# Altium PCB KNX_MCU_16CH_V1.2.PcbDoc (part 1 of 2)
Units mm, origin at the board's own origin, x right, y up, seen from the top; angles counter-clockwise.
Board outline 146.28 x 64.4 mm, 2 copper layers (F.Cu, B.Cu), stack 1.581 mm thick; 120 components, 124 nets, 397 pads, 284 vias.
Unrouted connection lines stored in the file: 62.
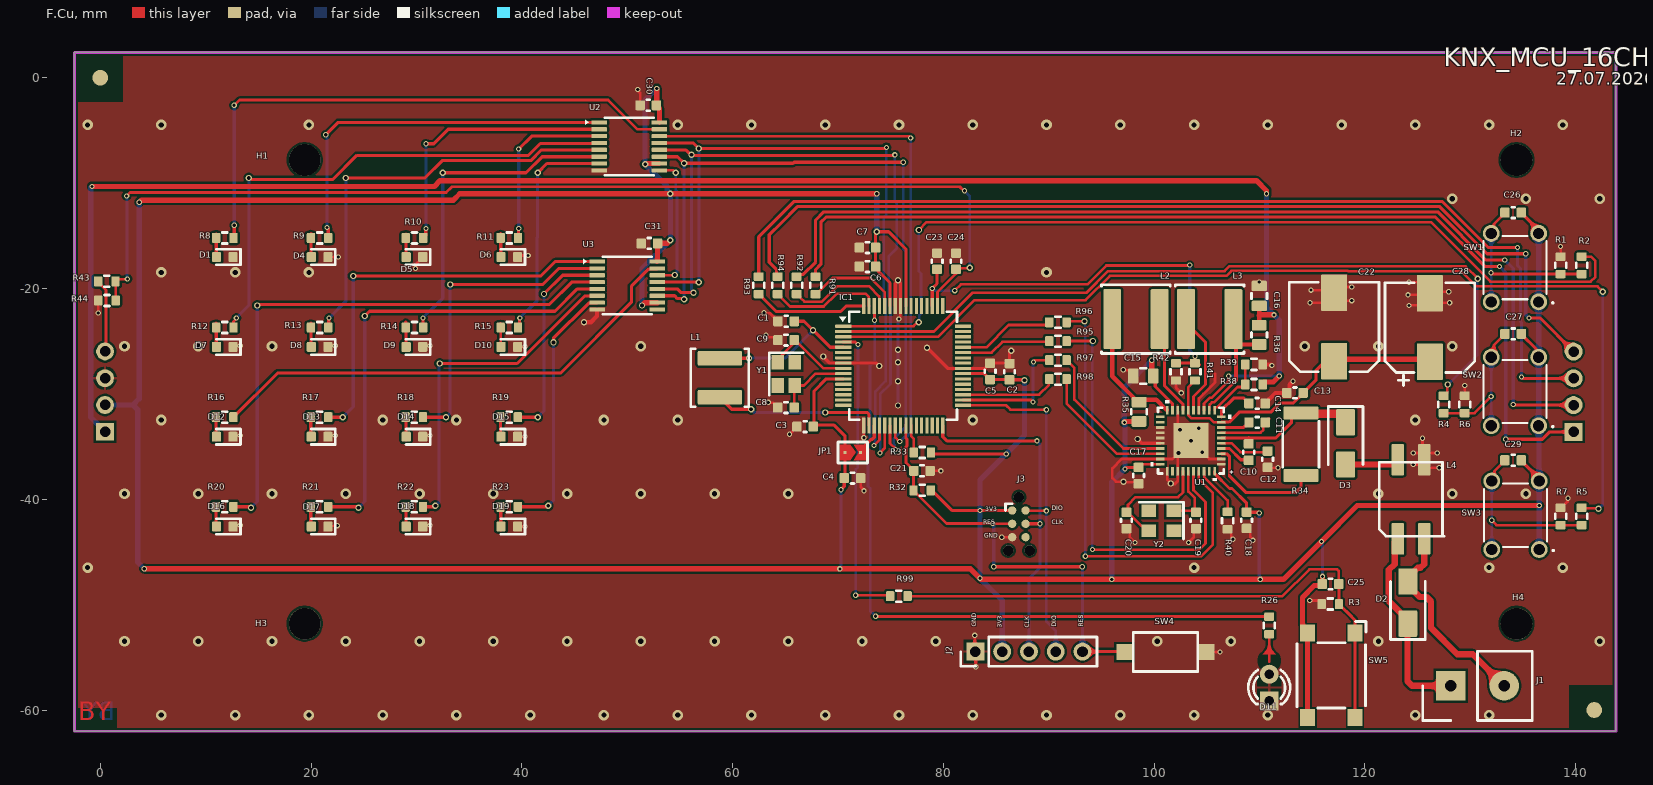
[diagram p0: F.Cu view]
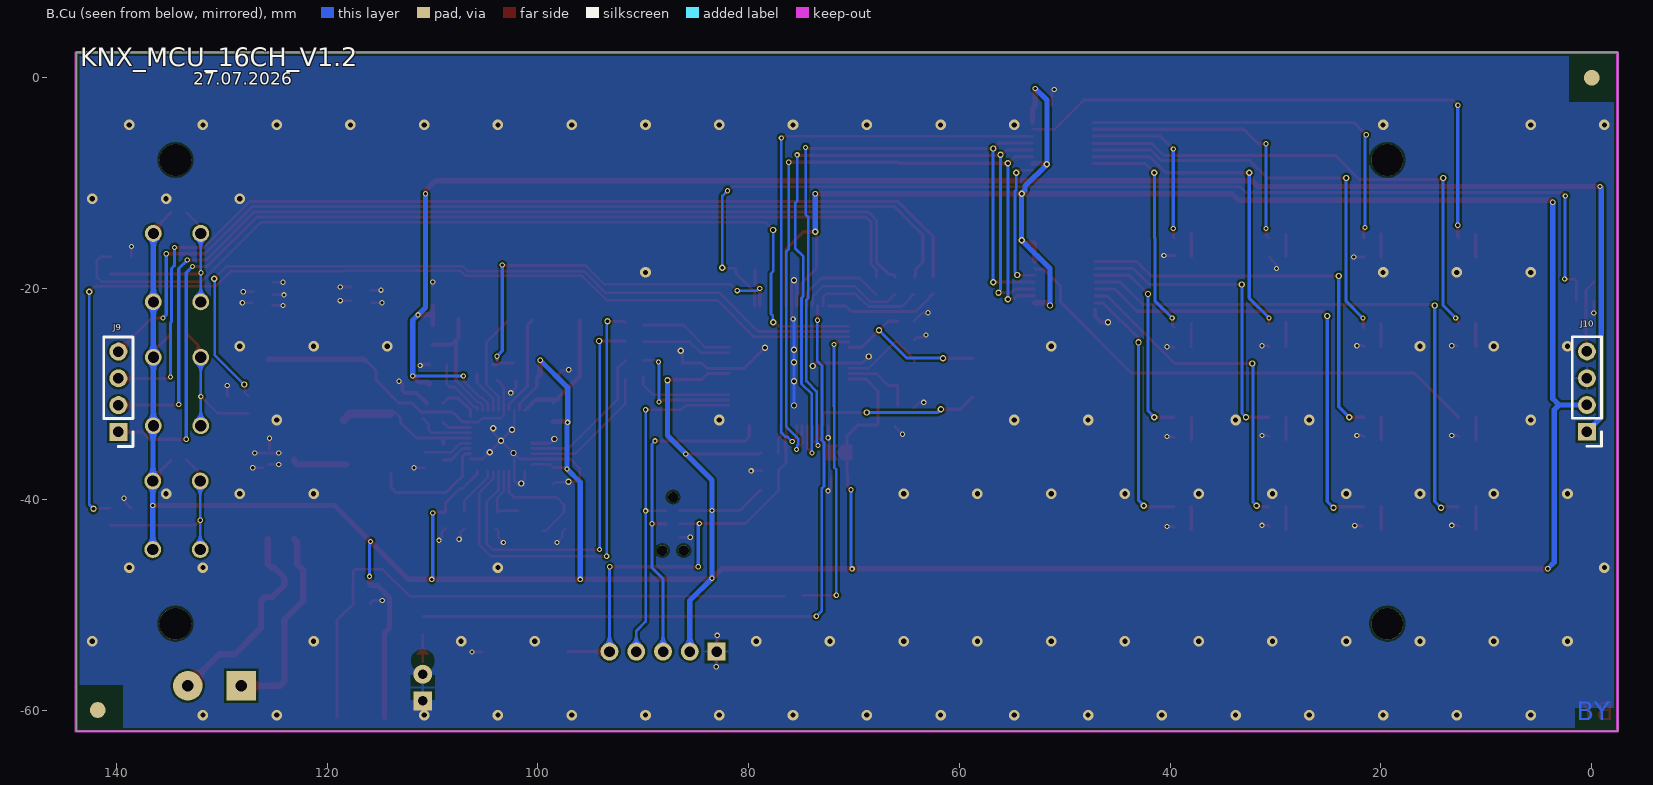
[diagram p1: B.Cu view, seen from below]

## Layer stack, top to bottom
F.Mask: solder mask 0.0102, Solder Resist, Dk 3.5
F.Cu: signal copper 0.0356
Dielectric 1: dielectric 1.51, FR-4, Dk 4.8
B.Cu: signal copper 0.0356
B.Mask: solder mask 0.0102, Solder Resist, Dk 3.5

## Board outline
-2.45,-62 -2.45,2.4 143.83,2.4 143.83,-62

## Design rules (kind name [scope] priority, off if disabled: settings)
Clearance "Clearence 0,5_Polygon" [InNamedPolygon('F.Cu--2') OR InNamedPolygon('B.Cu--2') OR InNamedPolygon('F.Cu--3') OR InNamedPolygon('B.Cu--3')] p1: gap=0.5 ignorepadtopadclearanceinfootprint=FALSE
Clearance "Clearence 0,4_Polygon" [InNamedPolygon('F.Cu--1') OR InNamedPolygon('B.Cu--1')] p2: gap=0.4 ignorepadtopadclearanceinfootprint=FALSE
Clearance "Clearence 0,3_Polygon" [InNamedPolygon('F.Cu-') OR InNamedPolygon('B.Cu-')] p3: gap=0.3 ignorepadtopadclearanceinfootprint=FALSE
Clearance [All] p4: gap=0.2 ignorepadtopadclearanceinfootprint=TRUE
ComponentClearance [All] p1: gap=0 collisioncheckmode=3 verticalgap=0.01 showdistances=FALSE
MinimumSolderMaskSliver [All] p1: minsoldermaskwidth=0
PolygonConnect [All] p1: thpad.connectstyle=Relief thpad.reliefconductorwidth=0.254 thpad.reliefentries=4 thpad.polygonreliefangle="90 Angle" thpad.airgapwidth=0.254 smdpad.connectstyle=Direct smdpad.reliefconductorwidth=0.254 smdpad.reliefentries=4 smdpad.polygonreliefangle="90 Angle" smdpad.airgapwidth=0.254 via.connectstyle=Direct via.reliefconductorwidth=0.254 via.reliefentries=4 via.polygonreliefangle="90 Angle" via.airgapwidth=0.254
PolygonConnect Polygon_B.Cu--3_ConnectDirect [IsNamedPolygon('B.Cu--3') vs IsVia] p2: connectstyle=Direct reliefconductorwidth=0.254 reliefentries=4 polygonreliefangle="90 Angle" airgapwidth=0.254
PolygonConnect Polygon_B.Cu--3_ConnectRelief45 [IsNamedPolygon('B.Cu--3') vs (IsThruPin or IsSMTPin) and (PadShape_AllLayers = 'Round')] p3: connectstyle=Relief reliefconductorwidth=0.4 reliefentries=4 polygonreliefangle="45 Angle" airgapwidth=0.4
PolygonConnect Polygon_B.Cu--3_ConnectRelief90 [IsNamedPolygon('B.Cu--3') vs (IsThruPin or IsSMTPin) and (PadShape_AllLayers <> 'Round')] p4: connectstyle=Relief reliefconductorwidth=0.4 reliefentries=4 polygonreliefangle="90 Angle" airgapwidth=0.4
PolygonConnect Polygon_F.Cu--3_ConnectDirect [IsNamedPolygon('F.Cu--3') vs IsVia] p5: connectstyle=Direct reliefconductorwidth=0.254 reliefentries=4 polygonreliefangle="90 Angle" airgapwidth=0.254
PolygonConnect Polygon_F.Cu--3_ConnectRelief45 [IsNamedPolygon('F.Cu--3') vs (IsThruPin or IsSMTPin) and (PadShape_AllLayers = 'Round')] p6: connectstyle=Relief reliefconductorwidth=0.4 reliefentries=4 polygonreliefangle="45 Angle" airgapwidth=0.4
PolygonConnect Polygon_F.Cu--3_ConnectRelief90 [IsNamedPolygon('F.Cu--3') vs (IsThruPin or IsSMTPin) and (PadShape_AllLayers <> 'Round')] p7: connectstyle=Relief reliefconductorwidth=0.4 reliefentries=4 polygonreliefangle="90 Angle" airgapwidth=0.4
PolygonConnect Polygon_B.Cu--2_ConnectDirect [IsNamedPolygon('B.Cu--2') vs IsVia] p8: connectstyle=Direct reliefconductorwidth=0.254 reliefentries=4 polygonreliefangle="90 Angle" airgapwidth=0.254
PolygonConnect Polygon_B.Cu--2_ConnectRelief45 [IsNamedPolygon('B.Cu--2') vs (IsThruPin or IsSMTPin) and (PadShape_AllLayers = 'Round')] p9: connectstyle=Relief reliefconductorwidth=0.4 reliefentries=4 polygonreliefangle="45 Angle" airgapwidth=0.4
PolygonConnect Polygon_B.Cu--2_ConnectRelief90 [IsNamedPolygon('B.Cu--2') vs (IsThruPin or IsSMTPin) and (PadShape_AllLayers <> 'Round')] p10: connectstyle=Relief reliefconductorwidth=0.4 reliefentries=4 polygonreliefangle="90 Angle" airgapwidth=0.4
PolygonConnect Polygon_F.Cu--2_ConnectDirect [IsNamedPolygon('F.Cu--2') vs IsVia] p11: connectstyle=Direct reliefconductorwidth=0.254 reliefentries=4 polygonreliefangle="90 Angle" airgapwidth=0.254
PolygonConnect Polygon_F.Cu--2_ConnectRelief45 [IsNamedPolygon('F.Cu--2') vs (IsThruPin or IsSMTPin) and (PadShape_AllLayers = 'Round')] p12: connectstyle=Relief reliefconductorwidth=0.4 reliefentries=4 polygonreliefangle="45 Angle" airgapwidth=0.4
PolygonConnect Polygon_F.Cu--2_ConnectRelief90 [IsNamedPolygon('F.Cu--2') vs (IsThruPin or IsSMTPin) and (PadShape_AllLayers <> 'Round')] p13: connectstyle=Relief reliefconductorwidth=0.4 reliefentries=4 polygonreliefangle="90 Angle" airgapwidth=0.4
PolygonConnect Polygon_B.Cu--1_ConnectDirect [IsNamedPolygon('B.Cu--1') vs IsVia] p14: connectstyle=Direct reliefconductorwidth=0.254 reliefentries=4 polygonreliefangle="90 Angle" airgapwidth=0.254
PolygonConnect Polygon_B.Cu--1_ConnectRelief45 [IsNamedPolygon('B.Cu--1') vs (IsThruPin or IsSMTPin) and (PadShape_AllLayers = 'Round')] p15: connectstyle=Relief reliefconductorwidth=0.4 reliefentries=4 polygonreliefangle="45 Angle" airgapwidth=0.4
PolygonConnect Polygon_B.Cu--1_ConnectRelief90 [IsNamedPolygon('B.Cu--1') vs (IsThruPin or IsSMTPin) and (PadShape_AllLayers <> 'Round')] p16: connectstyle=Relief reliefconductorwidth=0.4 reliefentries=4 polygonreliefangle="90 Angle" airgapwidth=0.4
PolygonConnect Polygon_F.Cu--1_ConnectDirect [IsNamedPolygon('F.Cu--1') vs IsVia] p17: connectstyle=Direct reliefconductorwidth=0.254 reliefentries=4 polygonreliefangle="90 Angle" airgapwidth=0.254
PolygonConnect Polygon_F.Cu--1_ConnectRelief45 [IsNamedPolygon('F.Cu--1') vs (IsThruPin or IsSMTPin) and (PadShape_AllLayers = 'Round')] p18: connectstyle=Relief reliefconductorwidth=0.4 reliefentries=4 polygonreliefangle="45 Angle" airgapwidth=0.4
PolygonConnect Polygon_F.Cu--1_ConnectRelief90 [IsNamedPolygon('F.Cu--1') vs (IsThruPin or IsSMTPin) and (PadShape_AllLayers <> 'Round')] p19: connectstyle=Relief reliefconductorwidth=0.4 reliefentries=4 polygonreliefangle="90 Angle" airgapwidth=0.4
PolygonConnect Polygon_B.Cu-_ConnectDirect [IsNamedPolygon('B.Cu-') vs IsVia] p20: connectstyle=Direct reliefconductorwidth=0.254 reliefentries=4 polygonreliefangle="90 Angle" airgapwidth=0.254
PolygonConnect Polygon_B.Cu-_ConnectRelief45 [IsNamedPolygon('B.Cu-') vs (IsThruPin or IsSMTPin) and (PadShape_AllLayers = 'Round')] p21: connectstyle=Relief reliefconductorwidth=0.3 reliefentries=4 polygonreliefangle="45 Angle" airgapwidth=0.3
PolygonConnect Polygon_B.Cu-_ConnectRelief90 [IsNamedPolygon('B.Cu-') vs (IsThruPin or IsSMTPin) and (PadShape_AllLayers <> 'Round')] p22: connectstyle=Relief reliefconductorwidth=0.3 reliefentries=4 polygonreliefangle="90 Angle" airgapwidth=0.3
PolygonConnect Polygon_F.Cu-_ConnectDirect [IsNamedPolygon('F.Cu-') vs IsVia] p23: connectstyle=Direct reliefconductorwidth=0.254 reliefentries=4 polygonreliefangle="90 Angle" airgapwidth=0.254
PolygonConnect Polygon_F.Cu-_ConnectRelief45 [IsNamedPolygon('F.Cu-') vs (IsThruPin or IsSMTPin) and (PadShape_AllLayers = 'Round')] p24: connectstyle=Relief reliefconductorwidth=0.3 reliefentries=4 polygonreliefangle="45 Angle" airgapwidth=0.3
PolygonConnect Polygon_F.Cu-_ConnectRelief90 [IsNamedPolygon('F.Cu-') vs (IsThruPin or IsSMTPin) and (PadShape_AllLayers <> 'Round')] p25: connectstyle=Relief reliefconductorwidth=0.3 reliefentries=4 polygonreliefangle="90 Angle" airgapwidth=0.3
RoutingVias [All] p1: holewidth=0.711 width=1.27 viastyle="Through Hole" minholewidth=0.711 minwidth=1.27 maxholewidth=0.711 maxwidth=1.27
SilkToSilkClearance [All] p1: silktosilkclearance=0
SilkToSolderMaskClearance [IsPad] p1: minsilkscreentomaskgap=0 clearancetoexposedcopper=TRUE
SolderMaskExpansion [All] p1: expansion=0 istentingtop=FALSE
SupplyNets "Schematic Supply Nets_3" [InNet('+3V3')] p1: voltage=0.000
SupplyNets "Schematic Supply Nets_2" [InNet('GND')] p2: voltage=0.000
SupplyNets "Schematic Supply Nets" [InNet('+12V')] p3: voltage=0.000
Width [All] p1: maxlimit=10 minlimit=0.2 preferedwidth=0.254 minimp=50.000000 maximp=50.000000 favimp=50.000000
26 further rules are at their usual default settings.

## Classes and differential pairs
component class UI_BUTTON_LED: C26 C27 C29 C30 C31 D1 D4 D5 D6 D7 D8 D9 D10 D12 D13 D14 D15 D16 D17 D18 D19 R1 R2 R4 R5 R6 R7 R8 R9 R10 R11 R12 R13 R14 R15 R16 R17 R18 R19 R20 R21 R22 R23 SW1 SW2 SW3 U2 U3
component class "Transceiver for KNx": C10 C11 C12 C13 C14 C15 C16 C17 C18 C19 C20 C22 C28 D2 D3 L2 L3 L4 R34 R35 R36 R38 R39 R40 U1 Y2
component class MCU: C1 C2 C3 C4 C5 C6 C7 C8 C9 C21 IC1 JP1 L1 R32 R33 SW4 Y1
component class KNX-MCU-CONTROL_V0.2: C23 C24 C25 D11 H1 H2 H3 H4 J1 J2 J3 R3 R26 R41 R42 R43 R44 R95 R96 R97 R98 R99 SW5
component class Connectors: J9 J10 R91 R92 R93 R94

## Components (designator, comment, footprint, x,y, rotation, side; value= is the part's Value field where it differs from the comment)
C1 "4.7uF" C_0603_1608METRIC 65.08,-23.1 r0 top
C2 "1uF" C_0603_1608METRIC 86.288,-27.887 r270 top
C3 "100nF" C_0603_1608METRIC 66.88,-33.1 r0 top
C4 "100nF" C_0603_1608METRIC 71.38,-38 r180 top
C5 "100nF" C_0603_1608METRIC 84.448,-27.857 r270 top
C6 "100nF" C_0603_1608METRIC 72.8,-17.913 r0 top
C7 "2.2uF" C_0603_1608METRIC 72.8,-16.113 r0 top
C8 "15pF" C_0603_1608METRIC 65.08,-31.3 r180 top
C9 "15pF" C_0603_1608METRIC 65.08,-24.9 r180 top
C10 "47nF" C_0603_1608METRIC 108.98,-35.525 r90 top
C11 "220nF" C_0603_1608METRIC 109.78,-32.7 r0 top
C12 "100nF" C_0603_1608METRIC 110.78,-36.2 r90 top
C13 "100nF" C_0603_1608METRIC 113.38,-29.9 r180 top
C14 "1uF" C_0603_1608METRIC 109.78,-30.9 r180 top
C15 "10uF" C_0805_2012Metric 98.98,-28.3 r0 top
C16 "10uF" C_0805_2012Metric 109.98,-20.7 r270 top
C17 "100nF" C_0603_1608METRIC 98.527,-37.752 r90 top
C18 "100nF" C_0603_1608METRIC 108.78,-42 r90 top
C19 "10pF" C_0603_1608METRIC 103.98,-42 r270 top
C20 "10pF" C_0603_1608METRIC 97.38,-42 r270 top
C21 "100nF" C_0603_1608METRIC 77.98,-37.3 r180 top
C22 "100uF" CP_Elec_8x10#1 117.08,-23.65 r90 top
C23 "100nF" C_0603_1608METRIC 79.4,-17.413 r90 top
C24 "100nF" C_0603_1608METRIC 81.2,-17.413 r90 top
C25 "100nF" C_0603_1608METRIC 116.752,-48.043 r180 top
C26 "100nF" C_0603_1608METRIC 134.08,-12.8 r180 top
C27 "100nF" C_0603_1608METRIC 134.08,-24.3 r180 top
C28 "470uf/16V" CP_Elec_8x10#2 126.18,-23.7 r270 top
C29 "100nF" C_0603_1608METRIC 134.08,-36.3 r180 top
C30 "100nF" C_0603_1608METRIC 52,-2.613 r180 top
C31 "100nF" C_0603_1608METRIC 52.1,-15.713 r0 top
D1 "LED" LED_0603_1608METRIC 11.813,-17.013 r180 top locked
D2 "SMAJ40CA-HT" D_SMA 124.08,-49.8 r90 top
D3 "SS28" D_SMA 118.18,-34.7 r270 top
D4 "LED" LED_0603_1608METRIC 20.813,-17.013 r180 top locked
D5 "LED" LED_0603_1608METRIC 29.813,-17.013 r180 top locked
D6 "LED" LED_0603_1608METRIC 38.813,-17.013 r180 top locked
D7 "LED" LED_0603_1608METRIC 11.813,-25.538 r180 top locked
D8 "LED" LED_0603_1608METRIC 20.813,-25.538 r180 top locked
D9 "LED" LED_0603_1608METRIC 29.813,-25.538 r180 top locked
D10 "LED" LED_0603_1608METRIC 38.812,-25.538 r180 top locked
D11 "Led_Green" LED_D3.0MM 110.93,-57.87 r90 top locked
D12 "LED" LED_0603_1608METRIC 11.813,-34.062 r180 top locked
D13 "LED" LED_0603_1608METRIC 20.813,-34.062 r180 top locked
D14 "LED" LED_0603_1608METRIC 29.813,-34.062 r180 top locked
D15 "LED" LED_0603_1608METRIC 38.812,-34.062 r180 top locked
D16 "LED" LED_0603_1608METRIC 11.813,-42.587 r180 top locked
D17 "LED" LED_0603_1608METRIC 20.813,-42.587 r180 top locked
D18 "LED" LED_0603_1608METRIC 29.813,-42.587 r180 top locked
D19 "LED" LED_0603_1608METRIC 38.813,-42.587 r180 top locked
H1 "MountingHole" MOUNTINGHOLE_3MM 19.39,-7.8 r270 top
H2 "MountingHole" MOUNTINGHOLE_3MM 134.4,-7.8 r270 top
H3 "MountingHole" MOUNTINGHOLE_3MM 19.39,-51.8 r270 top
H4 "MountingHole" MOUNTINGHOLE_3MM 134.4,-51.8 r270 top
IC1 "R7FA2L1AB3CFM" LQFP-64_10X10MM_P0.5MM 76.193,-27.327 r0 top locked
J1 "L-KLS8-2170-13" SAMTEC_HPM-02-01-X-S_STRAIGHT_1X02_PITCH5.08MM 128.15,-57.7 r90 top locked
J2 "Conn_01x05" PinHeader_1x05_P2.54mm_Vertical 83.048,-54.457 r90 top
J3 "Conn_ARM_SWD_TagConnect_TC2030-NL" Tag-Connect_TC2030-IDC-NL_2x03_P1.27mm_Vertical 87.173,-42.327 r270 top
J9 "Conn_01x04" PINHEADER_1X04_P2.54MM_VERTICAL 139.816,-33.604 r0 bottom locked
J10 "Conn_01x04" PINHEADER_1X04_P2.54MM_VERTICAL 0.45,-33.59 r0 bottom locked
JP1 "SolderJumper_2_Open" SolderJumper-2_P1.3mm_Open_TrianglePad1.0x1.5mm 71.408,-35.557 r0 top
L1 "4.7uH" L_APV_ANR5012 58.788,-28.467 r270 top
L2 "220uH" L_APV_ANR6028 98.28,-22.9 r180 top
L3 "220uH" L_APV_ANR6028 105.28,-22.9 r0 top
L4 "50474C" L_CommonMode_50474C_7.5x5.9mm 124.38,-40 r90 top
R1 "10k" R_0603_1608METRIC 138.58,-17.8 r90 top
R2 "330R" R_0603_1608METRIC 140.58,-17.8 r270 top
R3 "10K" R_0603_1608METRIC 116.727,-49.943 r0 top
R4 "330R" R_0603_1608METRIC 127.48,-31 r270 top
R5 "330R" R_0603_1608METRIC 140.58,-41.625 r270 top
R6 "10k" R_0603_1608METRIC 129.48,-31 r90 top
R7 "10k" R_0603_1608METRIC 138.58,-41.625 r90 top
R8 "1k" R_0603_1608METRIC 11.813,-15.2 r180 top
R9 "1k" R_0603_1608METRIC 20.813,-15.2 r180 top
R10 "1k" R_0603_1608METRIC 29.813,-15.2 r180 top
R11 "1k" R_0603_1608METRIC 38.813,-15.2 r180 top
R12 "1k" R_0603_1608METRIC 11.813,-23.7 r180 top
R13 "1k" R_0603_1608METRIC 20.813,-23.7 r180 top
R14 "1k" R_0603_1608METRIC 29.813,-23.7 r180 top
R15 "1k" R_0603_1608METRIC 38.813,-23.7 r180 top
R16 "1k" R_0603_1608METRIC 11.8,-32.213 r180 top
R17 "1k" R_0603_1608METRIC 20.8,-32.213 r180 top
R18 "1k" R_0603_1608METRIC 29.8,-32.213 r180 top
R19 "1k" R_0603_1608METRIC 38.8,-32.213 r180 top
R20 "1k" R_0603_1608METRIC 11.8,-40.713 r180 top
R21 "1k" R_0603_1608METRIC 20.8,-40.713 r180 top
R22 "1k" R_0603_1608METRIC 29.8,-40.713 r180 top
R23 "1k" R_0603_1608METRIC 38.8,-40.713 r180 top
R26 "1K" R_0603_1608METRIC 110.93,-51.97 r270 top
R32 "10K" R_0603_1608METRIC 77.998,-39.157 r0 top
R33 "10K" R_0603_1608METRIC 78.008,-35.557 r0 top
R34 "27R" R_2512_6332Metric 113.937,-34.772 r270 top
R35 "1R" R_0805_2012Metric 98.58,-31.7 r270 top
R36 "1R" R_0805_2012Metric 109.98,-24.4 r90 top
R38 "91K" R_0603_1608METRIC 109.48,-29.1 r180 top
R39 "10K" R_0603_1608METRIC 109.48,-27.2 r0 top
R40 "20k" R_0603_1608METRIC 106.977,-42.022 r90 top
R41 "220k" R_0603_1608METRIC 103.88,-27.9 r90 top
R42 "27k" R_0603_1608METRIC 102.08,-27.9 r270 top
R43 "100k" R_0603_1608METRIC 0.616,-19.319 r0 top
R44 "27k" R_0603_1608METRIC 0.636,-21.129 r180 top
R91 "33R" R_0603_1608METRIC 67.88,-19.7 r90 top
R92 "33R" R_0603_1608METRIC 66.08,-19.7 r90 top
R93 "33R" R_0603_1608METRIC 62.48,-19.7 r90 top
R94 "33R" R_0603_1608METRIC 64.28,-19.7 r90 top
R95 "33R" R_0603_1608METRIC 90.88,-25 r180 top
R96 "33R" R_0603_1608METRIC 90.88,-23.2 r180 top
R97 "33R" R_0603_1608METRIC 90.88,-26.8 r180 top
R98 "33R" R_0603_1608METRIC 90.88,-28.6 r180 top
R99 "330R" R_0603_1608METRIC 75.78,-49.2 r180 top
SW1 "TL1105BF160Q" TL1105 134.248,-18.017 r90 top locked
SW2 "TL1105BF160Q" TL1105 134.248,-29.767 r90 top locked
SW3 "TL1105BF160Q" TL1105 134.298,-41.517 r90 top locked
SW4 "SW_Push" SW_SPST_CK_RS282G05A3 101.08,-54.5 r0 top
SW5 "SW_Push" SW_SPST_OMRON_B3FS-100XP 116.82,-56.7 r270 top locked
U1 "NCN5130MNTWG" QFN40_485AU-01_ONS 103.497,-34.432 r180 top locked
U2 "74HC595PW,118" TSSOP-16_4.4X5MM_P0.65MM 50.2,-6.513 r0 top
U3 "74HC595PW,118" TSSOP-16_4.4X5MM_P0.65MM 50,-19.713 r0 top
Y1 "20Mhz" Crystal_SMD_SeikoEpson_FA238-4Pin_3.2x2.5mm 65.088,-28.102 r270 top
Y2 "16Mhz" Crystal_SMD_SeikoEpson_FA238V-4Pin_3.2x2.5mm 100.687,-42.022 r180 top

## Footprints (in the part's own frame and the unit in brackets; to place one, negate y for a bottom-side part, rotate by r counter-clockwise, add the part's x,y. Pads: shape width x height; smd on the part's side, far side on the other; paste and mask are expansions set on the pad)
C_0603_1608METRIC [mm]
  rrect25% 0.9x0.95 smd mask+0.05: 1(-0.771,-0.005) 2(0.779,-0.005)
  silkscreen extent -0.14,-0.52 0.14,0.5
C_0805_2012Metric [mm]
  rrect25% 1x1.45 smd mask+0.05: 1(-0.95,0) 2(0.95,0)
  silkscreen extent -0.26,-0.73 0.26,0.73
CP_Elec_8x10#1 [mm]
  rrect10% 3.5x2.5 smd mask+0.05: 1(-3.25,0) 2(3.25,0)
  silkscreen extent -4.26,-4.26 4.26,4.26
CP_Elec_8x10#2 [mm]
  rrect10% 3.5x2.5 smd mask+0.05: 1(3.25,0) 2(-3.25,0)
  silkscreen extent -4.26,-4.26 5.5,4.26
Crystal_SMD_SeikoEpson_FA238-4Pin_3.2x2.5mm [mm]
  rect 1.4x1.2 smd mask+0.05: 1(-1.1,-0.8) 2(1.1,0.8) 3(1.1,-0.8) 4(-1.1,0.8)
  silkscreen extent -2,-1.6 2,1.6
Crystal_SMD_SeikoEpson_FA238V-4Pin_3.2x2.5mm [mm]
  rect 1.4x1.2 smd mask+0.05: 1(-1.2,-0.95) 2(1.2,-0.95) 3(1.2,0.95) 4(-1.2,0.95)
  silkscreen extent -2.1,-1.75 2.1,1.75
D_SMA [mm]
  rrect14% 2.5x1.8 smd mask+0.05: 1(-2,0) 2(2,0)
  silkscreen extent -3.51,-1.65 2,1.65
L_APV_ANR5012 [mm]
  rrect18% 1.4x4.2 smd mask+0.05: 1(-1.85,0) 2(1.85,0)
  silkscreen extent -2.76,-2.76 2.76,2.76
L_APV_ANR6028 [mm]
  rrect15% 1.7x5.7 smd mask+0.05: 1(-2.25,0) 2(2.25,0)
  silkscreen extent -3.26,-3.26 3.26,3.26
L_CommonMode_50474C_7.5x5.9mm [mm]
  rrect20% 3x1.2 smd mask+0.05: 1(-3.75,1.25) 2(-3.75,-1.25) 3(3.75,-1.25) 4(3.75,1.25)
  silkscreen extent -3.5,-3.14 3.5,3
LED_0603_1608METRIC [mm]
  rrect25% 0.875x0.95 smd mask+0.05: 1(-0.787,0) 2(0.787,0)
  silkscreen extent -1.49,-0.73 0.8,0.73, body extent -0.86,-0.4 0.74,0.4, height 0.6
LED_D3.0MM [mm]
  rect 1.8x1.8 hole 0.9 mask+0.05: 1(-1.27,0)
  round 1.8 hole 0.9 mask+0.05: 2(1.27,0)
  silkscreen extent -1.56,-1.99 1.67,1.99, body extent -1.6,-1.6 1.6,1.6, height 13
LQFP-64_10X10MM_P0.5MM [mm]
  rrect25% 1.55x0.3 smd mask+0.05: 1(-5.675,3.75) 2(-5.675,3.25) 3(-5.675,2.75) 4(-5.675,2.25) 5(-5.675,1.75) 6(-5.675,1.25) 7(-5.675,0.75) 8(-5.675,0.25) 9(-5.675,-0.25) 10(-5.675,-0.75) 11(-5.675,-1.25) 12(-5.675,-1.75) 13(-5.675,-2.25) 14(-5.675,-2.75) 15(-5.675,-3.25) 16(-5.675,-3.75) 33(5.675,-3.75) 34(5.675,-3.25) 35(5.675,-2.75) 36(5.675,-2.25) 37(5.675,-1.75) 38(5.675,-1.25) 39(5.675,-0.75) 40(5.675,-0.25) 41(5.675,0.25) 42(5.675,0.75) 43(5.675,1.25) 44(5.675,1.75) 45(5.675,2.25) 46(5.675,2.75) 47(5.675,3.25) 48(5.675,3.75)
  rrect25% 0.3x1.55 smd mask+0.05: 17(-3.75,-5.675) 18(-3.25,-5.675) 19(-2.75,-5.675) 20(-2.25,-5.675) 21(-1.75,-5.675) 22(-1.25,-5.675) 23(-0.75,-5.675) 24(-0.25,-5.675) 25(0.25,-5.675) 26(0.75,-5.675) 27(1.25,-5.675) 28(1.75,-5.675) 29(2.25,-5.675) 30(2.75,-5.675) 31(3.25,-5.675) 32(3.75,-5.675) 49(3.75,5.675) 50(3.25,5.675) 51(2.75,5.675) 52(2.25,5.675) 53(1.75,5.675) 54(1.25,5.675) 55(0.75,5.675) 56(0.25,5.675) 57(-0.25,5.675) 58(-0.75,5.675) 59(-1.25,5.675) 60(-1.75,5.675) 61(-2.25,5.675) 62(-2.75,5.675) 63(-3.25,5.675) 64(-3.75,5.675)
  silkscreen extent -6.06,-5.11 5.11,5.11, body extent -6,-6 6,6, height 1.7
MOUNTINGHOLE_3MM [mm]
  round 3 hole 3 mask+0.05: Un1(0,0)
PINHEADER_1X04_P2.54MM_VERTICAL [mm]
  rect 1.7x1.7 hole 1 mask+0.05: 1(0,0)
  round 1.7 hole 1 mask+0.05: 2(0,-2.54) 3(0,-5.08) 4(0,-7.62)
  silkscreen extent -1.38,-9 1.38,1.38, body extent -1.27,-8.98 1.27,1.31, height 15.75
PinHeader_1x05_P2.54mm_Vertical [mm]
  rect 1.7x1.7 hole 1 mask+0.05: 1(0,0)
  round 1.7 hole 1 mask+0.05: 2(0,-2.54) 3(0,-5.08) 4(0,-7.62) 5(0,-10.16)
  silkscreen extent -1.38,-11.54 1.38,1.38
QFN40_485AU-01_ONS [mil]
  rect 32x10 smd mask+1.97: 1(-114,88.58) 2(-114,68.9) 3(-114,49.21) 4(-114,29.53) 5(-114,9.84) 6(-114,-9.84) 7(-114,-29.53) 8(-114,-49.21) 9(-114,-68.9) 10(-114,-88.58) 21(114,-88.58) 22(114,-68.9) 23(114,-49.21) 24(114,-29.53) 25(114,-9.84) 26(114,9.84) 27(114,29.53) 28(114,49.21) 29(114,68.9) 30(114,88.58)
  rect 10x32 smd mask+1.97: 11(-88.58,-114) 12(-68.9,-114) 13(-49.21,-114) 14(-29.53,-114) 15(-9.84,-114) 16(9.84,-114) 17(29.53,-114) 18(49.21,-114) 19(68.9,-114) 20(88.58,-114) 31(88.58,114) 32(68.9,114) 33(49.21,114) 34(29.53,114) 35(9.84,114) 36(-9.84,114) 37(-29.53,114) 38(-49.21,114) 39(-68.9,114) 40(-88.58,114)
  rect 130x130 smd mask+1.97: 41(0,0)
  silkscreen extent -150,-150 150,150
R_0603_1608METRIC [mm]
  rrect25% 0.8x0.95 smd mask+0.05: 1(-0.825,0) 2(0.825,0)
  silkscreen extent -0.24,-0.52 0.24,0.52
R_0805_2012Metric [mm]
  rrect24% 1.025x1.4 smd mask+0.05: 1(-0.913,0) 2(0.913,0)
  silkscreen extent -0.23,-0.73 0.23,0.73
R_2512_6332Metric [mm]
  rrect20% 1.225x3.35 smd mask+0.05: 1(-2.963,0) 2(2.963,0)
  silkscreen extent -2.18,-1.71 2.18,1.71
SAMTEC_HPM-02-01-X-S_STRAIGHT_1X02_PITCH5.08MM [mm]
  rect 2.8x2.8 hole 1.1 mask+0.05: 1(0,0)
  round 2.8 hole 1.1 mask+0.05: 2(0,-5.08)
  silkscreen extent -3.28,-7.73 3.28,2.65, body extent -0.5,-5.58 0.5,0.5, height 15
SolderJumper-2_P1.3mm_Open_TrianglePad1.0x1.5mm [mm]
  rect 0.3x0.3 smd paste-0.3 mask+0.05: 1(-0.725,0) 2(0.725,0)
  F.Cu region: 0.275,0 -0.225,-0.75 -1.225,-0.75 -1.225,0.75 -0.225,0.75
  F.Cu region: 1.225,-0.75 0.075,-0.75 0.575,0 0.075,0.75 1.225,0.75
  silkscreen extent -1.4,-1 1.4,1
SW_SPST_CK_RS282G05A3 [mm]
  rect 1.5x1.5 smd mask+0.05: 1(-3.9,0) 2(3.9,0)
  silkscreen extent -3.06,-1.85 3.06,1.85
SW_SPST_OMRON_B3FS-100XP [mm]
  rect 1.6x1.4 smd mask+0.05: 1(-4,2.25) 1(4,2.25) 2(-4,-2.25) 2(4,-2.25)
  silkscreen extent -5.1,-3.25 3.1,3.3, body extent -3,-3 3,3, height 12
Tag-Connect_TC2030-IDC-NL_2x03_P1.27mm_Vertical [mil]
  round 31 smd paste-31 mask+1.97: 1(-50,-25) 2(-50,25) 3(0,-25) 4(0,25) 5(50,-25) 6(50,25)
  round 39 hole 39 mask+1.97: Un1(-100,0) Un2(100,40) Un3(100,-40)
  silkscreen extent -75,-50 -50,-25
TL1105 [mm]
  round 1.6 hole 1.06: 1(-3.25,-2.25) 2(3.25,-2.25) 3(-3.25,2.25) 4(3.25,2.25)
  silkscreen extent -3.4,-3.64 3,3, body extent -3,-3 3,3, height 20.5
TSSOP-16_4.4X5MM_P0.65MM [mm]
  rrect25% 1.475x0.4 smd mask+0.05: 1(-2.863,2.275) 2(-2.863,1.625) 3(-2.863,0.975) 4(-2.863,0.325) 5(-2.863,-0.325) 6(-2.863,-0.975) 7(-2.863,-1.625) 8(-2.863,-2.275) 9(2.863,-2.275) 10(2.863,-1.625) 11(2.863,-0.975) 12(2.863,-0.325) 13(2.863,0.325) 14(2.863,0.975) 15(2.863,1.625) 16(2.863,2.275)
  silkscreen extent -4.19,-2.74 2.31,2.74

## Part data
C1 C2 C3 C4 C5 C6 C7 C10 C11 C14 C21 C25 C26 C27 C29: library part C_3, Package=C_0603
  C1: MF="Samsung Electro-Mechanics", MP=CL10B475KQ8NQNC, OZD=C1608X7S1A475K080AC
  C2 C14: MF="Samsung Electro-Mechanics", MP=CL10B105KP8NNNC, OZD=CL10B105KP8NNNC
  C3 C4 C5 C6 C21 C25 C26 C27 C29: MF=YAGEO, MP=CC0603KRX7R9BB104
  C7: MF="Samsung Electro-Mechanics", MP=CL10B225KP8NNNC, OZD=CL10B225KP8NNNC
  C10: MF=SAMSUNG, MP=CL10B473KB8NNNC, OZD=CL10B473KB8NNNC
  C11: MF="Samsung Electro-Mechanics", MP=CL10B224KB8NNNC, OZD=CL10B224KB8NNNC
C8 C9 C19 C20: library part 20pF_0402_50V_5%, Package=C0603, MF="Samsung Electro-Mechanics"
  C8 C9: MP=CL10C150JB8NNNC, OZD=CL10C150JB8NNNC
  C19 C20: MP=CL10C100JB8NNNC, OZD=CL10C100JB8NNNC
C12 C13 C17 C18 C23 C24 C30 C31: library part C_1, Package=C_0603
  C12 C13 C17 C18 C23 C24: MF="Samsung Electro-Mechanics", MP=CL10B104KB8NNNC
  C30 C31: MF=YAGEO, MP=CC0603KRX7R9BB104
C15 C16: library part C_3, Package=C_0805, MF="Samsung Electro-Mechanics", MP=CL21B106KOQNNNE, OZD=CL21B106KOQNNNE
C22: library part C_US, Package="Radial D8 L10", MF=SUSCON, MP=CD035M101F10PKKKV00A
C28: library part C_US, OZD=EEEFK1C471P
D1 D4 D5 D6 D7 D8 D9 D10 D12 D13 D14 D15 D16 D17 D18 D19: Package=L_0603, MF=LITEON, MP=LTST-C190KFKT-5A, Sim.Pins="1=K 2=A"
D2: library part D_TVS, Package="DO214AC (SMA)", MF=HOTTECH, MP=SMAJ40CA-HT, OZD=SMAJ40CA-HT
D3: Package="DO214AC (SMA)", MF=HOTTECH, MP=SS18-HT, OZD=SS18-HT
D11: library part LED, Package="Through Hole,D=3mm", MF=TUOZHAN, MP=TZ-L2-03YYBYG1GDJ30-001, OZD=FYL-5014UBC1C-1MA-TR13
IC1: Package=LFQFP-64(10x10), MF=RENESAS, MP=R7FA2L1AB3CFM
J1: library part Screw_Terminal_01x02, Package="THT V/T", MF="KLS ELECTRONIC", MP=L-KLS8-2170-13, OZD=L-KLS8-2170-13
L1 L2 L3: library part L, Package="Non Standard"
  L1: Field6=NRS5030T4R7MMGJV, MF=VIKING, MP=PCD0302MT4R7, OZD=PCD0302MT4R7
  L2 L3: MF="CORE MASTER", MP=NR6028-221M
L4: library part Choke_Wurth_WE-CNSW_744232090, Package=SMD-4P,7x5.9mm, MF=muRata, MP=50474C, OZD=50474C
R1 R2 R4 R5 R6 R7 R8 R9 R10 R11 R12 R13 R14 R15 R16 R17 R18 R19 R20 R21 R22 R23: library part R, Package=R_0603
  R1 R6 R7: MF=FOJAN, MP=FRC0603J103TS
  R2 R4 R5: MF=FOJAN, MP="FRC0603J331 TS"
  R8 R9 R10 R11 R12 R13 R14 R15 R16 R17 R18 R19 R20 R21 R22 R23: MF=YAGEO, MP=RC0603JR-071KL
R3 R32 R33 R38 R39 R40 R41 R42 R43 R44 R91 R92 R93 R94 R95 R96 R97 R98 R99: library part R_US, Package=R_0603
  R3 R32 R33: MF=FOJAN, MP=FRC0603J103TS
  R38: MF=ROYALOHM, MP=0603SAF9102T5E, OZD=0603SAF9102T5E
  R39: MF=ROYALOHM, MP=PS03W4F1002T5E, OZD=PS03W4F1002T5E
  R40: MF=ROYALOHM, MP=0603SAF2002T5E, OZD=0603SAF2002T5E
  R41: MF=PANASONIC, MP=ERJ3EKF2203V
  R42 R44: MF=PANASONIC, MP=ERJ3EKF2702V
  R43: MF=YAGEO, MP=RC0603FR-07100KL
  R91 R92 R93 R94: MF=YAGEO, MP=RC0603JR-0733RL
  R95 R96 R97 R98: MF=ROYALOHM, MP=0603SAF330JT5E, OZD=0603SAF330JT5E
  R99: MF=FOJAN, MP="FRC0603J331 TS"
R26: library part R_7, Package=R0603, MF=VO, MP=SCR0603J1K
R34: library part R_US, Package=R_2512, MF=ROYALOHM, MP=HP122WF270JT4E, OZD=HP122WF270JT4E
R35 R36: library part R_US, Package=R_0805, MF=PANASONIC, MP=ERJ6RQF1R0V, OZD=ERJ6RQF1R0V
SW1 SW2 SW3: "Switch", Manufacturer_Name=E-Switch, Mouser Part Number=612-TL1105B, Datasheet Link=https://configured-product-images.s3.amazonaws.com/2D/specs/TL1105BF160Q.pdf, Manufacturer_Part_Number=TL1105BF160Q, Mouser Price/Stock=https://www.mouser.co.uk/ProductDetail/E-Switch/TL1105BF160Q?qs=YXf4ACKMM4xZnIL%2FJEeFtQ%3D%3D
SW5: Package=SMD,12x12mm, MF=kinghelm, MP=KH-12X12X8H-SMT
U1: Package=QFN-40-EP(6x6), MF=onsemi, MP=NCN5130MNTWG
U2 U3: library part 74HC595, Package=TSSOP-16, MF=Nexperia, MP=74HC595PW,118
Y1: library part Crystal, Package="4-SMD 3225", MF=RALTRON, MP=FL3P2X2P5SSC, OZD=RH100-20.000-10-1010-TR
Y2: library part Crystal, Package=4-SMD, MF=RALTRON, MP=RH100-16.000-10-1010-EXT, OZD=RH100-16.000-10-1010-EXT

## Free pads (board coordinates)
  round 1.5 smd mask+1: 2(0,0) 3(141.78,-60)
  round 1.5 smd far side mask+1: 4(141.78,-60) 5(0,0)

## Via types
v1: diameter 0.5, hole 0.3, F.Cu to B.Cu, tented both sides, 133 vias
v2: diameter 1, hole 0.5, F.Cu to B.Cu, tented both sides, 88 vias
v3: diameter 0.6, hole 0.35, F.Cu to B.Cu, tented both sides, 63 vias

## Nets (pads, with @x,y where several pads share a name; then routed paths per layer and width w, separated by ;. In a path a pad name is that pad's centre, name@x,y a point inside that pad or via, vN(x,y) a via of type N, cw(c..) or ccw(c..) an arc to the next point about the centre after c; other vN are vias at no path point)
+3V3: C2.2 C3.2 C4.2 C5.2 C6.2 C7.2 C15.2 C17.2 C18.2 C25.2 C26.1 C27.1 C29.1 C30.1 C31.1 IC1.11 IC1.39 IC1.56 IC1.59 J2.2 J3.1 J10.2 JP1.1 R32.2 R33.2 R35.2 SW1.1 SW1.2 SW2.1 SW2.2 SW3.1 SW3.2 SW5.2 U1.19 U1.30 U1.40 U2.10 U2.16 U3.10 U3.16 | length 473.5
  F.Cu w0.254: v1(65.4,-33.83) 66.093,-33.137 66.093,-33.1 ; 72.18,-37.987 72.18,-38.856 72.48,-39.156 v1(72.48,-39.2) ; v1(97.237,-37.122) 97.382,-36.977 98.527,-36.977 98.822,-36.682 U1.30@100.601,-36.682
  F.Cu w0.3: v1(70.28,-39.1) 70.605,-38.775 C4.2@70.605,-38 ; IC1.11@70.518,-28.577 68.888,-28.577 67.733,-29.732 67.733,-32.957 69.637,-32.957 70.683,-34.003 JP1.1@70.683,-35.557 70.683,-37.652 C4.2@70.598,-37.737 ; C6.2@73.575,-17.913 73.575,-16.232 C7.2@73.595,-16.212 ; C7.2@73.575,-16.113 73.575,-14.799 73.68,-14.694 v3(73.68,-14.613) 74.813,-14.613 76.443,-16.243 IC1.56@76.443,-21.652 ; C6.2@73.653,-18.173 74.943,-19.463 IC1.59@74.943,-21.652 ; R32.2@78.823,-39.157 78.908,-39.157 80.808,-41.057 v1(83.48,-41.057) J3.1@86.538,-41.057 ; R33.2@78.833,-35.557 78.977,-35.7 v1(85.965,-35.7) v1@85.98,-35.7 ; IC1.39@81.868,-28.077 83.893,-28.077 84.448,-28.632 86.258,-28.632 86.288,-28.662 87.553,-28.662 v3@87.608,-28.607 ; C15.2@99.93,-28.3 100.115,-28.485 100.115,-29.299 101.747,-30.931 U1.19@101.747,-31.536 ; U1.40@105.747,-37.327 105.747,-37.561 107.158,-38.972 107.392,-38.972 108.78,-40.36 108.78,-41.225 109.905,-41.225 v1(109.98,-41.3) ; C29.1@134.855,-36.3 134.855,-36.325 136.548,-38.018 SW3.2@136.548,-38.267 ; C27.1@134.855,-24.3 134.855,-24.325 136.25,-25.72 136.25,-26.268 SW2.2@136.498,-26.517 ; C26.1@134.855,-12.8 134.855,-12.825 136.498,-14.468 SW1.2@136.498,-14.767
  F.Cu w0.5: v1(3.7,-11.813) 3.9,-11.613 33.5,-11.613 34.113,-11 v1(73.68,-11) ; v1@4.164,-46.6 v1(70.18,-46.6) 82.58,-46.6 v1(83.48,-47.5) 83.58,-47.6 v1(95.98,-47.6) v1(110.08,-47.6) 112.28,-47.6 v1(115.88,-44) 119.28,-40.6 v1(136.548,-40.6) v1@136.58,-40.6 ; v3(51.4,-21.613) 51.675,-21.338 U3.10@52.863,-21.338 ; v3(51.7,-8.213) 51.727,-8.213 51.802,-8.138 U2.10@53.063,-8.138 ; v1(52.8,-1.012) 52.8,-2.587 52.775,-2.613 52.775,-2.638 53.063,-2.925 U2.16@53.063,-4.238 ; U3.16@52.863,-17.438 52.863,-17.213 52.869,-17.206 52.869,-15.719 52.875,-15.713 53.8,-15.713 v3(54.1,-15.413) ; v1(97.18,-32.7) 97.268,-32.612 R35.2@98.58,-32.612 ; v1(99.78,-26.8) 99.78,-28.15 C15.2@99.93,-28.3 ; SW5.2@114.57,-60.7 SW5.2@114.57,-52.7 114.12,-52.25 114.12,-51.897 114.08,-51.857 114.08,-49.31 115.202,-48.188 115.831,-48.188 115.977,-48.043 v1(115.977,-47.313)
  B.Cu w0.3: v1(70.18,-46.6) 70.28,-46.5 v1(70.28,-39.1) ; v1(109.98,-41.3) 109.98,-47.5 v1(110.08,-47.6) ; v1(115.88,-44) 115.918,-44.038 115.918,-44.18 115.977,-44.238 115.977,-45.686 v1(115.977,-47.313)
  B.Cu w0.5: J10.2@0.45,-31.05 3.101,-31.05 ; v1(3.7,-11.813) 3.7,-30.451 3.101,-31.05 ; v1(4.164,-46.586) 3.564,-45.986 3.564,-31.514 3.101,-31.05 ; v3(51.4,-21.613) 51.4,-18.113 v3(54.1,-15.413) v3(54.1,-11.013) 54.1,-10.985 53.772,-10.658 53.772,-10.285 v3(51.7,-8.213) 51.7,-2.113 v1(52.8,-1.012) ; v3(73.68,-14.613) v1(73.68,-11) ; J2.2@85.588,-54.457 85.588,-49.608 v1(83.48,-47.5) v1(83.48,-41.057) 83.48,-38.185 v1(85.965,-35.7) 87.708,-33.957 v3(87.708,-28.707) ; v1(95.98,-47.6) 95.98,-38.378 v1(97.237,-37.122) 97.237,-32.757 v1(97.18,-32.7) 97.18,-29.4 v1(99.78,-26.8) ; SW1.2@136.498,-14.767 SW1.1@136.498,-21.267 SW2.2@136.498,-26.517 SW2.1@136.498,-33.017 136.523,-33.042 136.523,-38.242 SW3.2@136.548,-38.267 v1(136.548,-40.6) SW3.1@136.548,-44.767
+12V: C16.2 J10.1 R36.2 R38.1 U1.13 | length 168.4
  F.Cu w0.254: U1.13@104.747,-31.536 104.747,-30.904 105.298,-30.353 105.488,-30.353 107.033,-28.808 107.033,-28.347 v1(107.08,-28.3)
  F.Cu w0.4: R36.2@109.98,-23.487 109.98,-22.569 C16.2@109.98,-21.65
  F.Cu w0.5: v1(-0.8,-10.313) 31.7,-10.313 32.25,-9.763 109.717,-9.763 110.68,-10.725 v1(110.68,-11) ; 109.98,-22.569 110.049,-22.5 v1(111.38,-22.5) ; R38.1@110.305,-29.1 110.305,-29.025 110.455,-28.875 111.305,-28.875 v1(111.88,-28.3)
  B.Cu w0.254: v1(107.08,-28.3) v1(111.88,-28.3)
  B.Cu w0.5: v1(-0.8,-10.313) -0.9,-10.413 -0.9,-32.24 J10.1@0.45,-33.59 ; v1(110.68,-11) 110.68,-21.8 v1(111.38,-22.5) 111.88,-23 v1(111.88,-28.3)
-A: D2.2 J1.2 L4.2 | length 19.8
  F.Cu w0.6: L4.2@125.63,-43.75 125.63,-46.15 125.279,-46.501 125.029,-46.501 124.08,-47.45 D2.2@124.08,-47.8 124.08,-48.15 125.206,-49.276 125.856,-49.276 126.28,-49.7 126.28,-52.2 128.78,-54.7 130.23,-54.7 J1.2@133.23,-57.7
A: D2.1 J1.1 L4.1 | length 18.9
  F.Cu w0.6: L4.1@123.13,-43.75 122.83,-44.05 122.83,-46.15 122.28,-46.7 122.28,-49.65 124.08,-51.45 D2.1@124.08,-51.8 124.049,-51.831 124.049,-57.269 124.48,-57.7 J1.1@128.15,-57.7
BTN_DOWN: IC1.3 R5.1 | length 97.9
  F.Cu w0.25: IC1.3@70.518,-24.577 79.503,-24.577 82.98,-21.1 93.516,-21.1 95.816,-18.8 106.88,-18.8 107.355,-18.325 118.391,-18.325 118.416,-18.35 129.13,-18.35 130.58,-19.8 142.08,-19.8 v3(142.58,-20.3) ; R5.1@140.58,-40.8 140.63,-40.85 142.13,-40.85 v3(142.18,-40.9)
  B.Cu w0.25: v3(142.18,-40.9) 142.58,-40.5 v3(142.58,-20.3)
BTN_ENTER: IC1.2 R4.1 | length 75.8
  F.Cu w0.25: IC1.2@70.518,-24.077 79.103,-24.077 82.78,-20.4 93.58,-20.4 95.63,-18.35 106.694,-18.35 107.169,-17.875 118.578,-17.875 118.603,-17.9 129.564,-17.9 v3(130.722,-19.058) ; R4.1@127.48,-30.175 127.538,-30.175 127.813,-29.9 127.813,-29.167 v3(127.88,-29.1)
  B.Cu w0.25: v3(127.88,-29.1) 130.68,-26.3 130.68,-19.1 v3(130.722,-19.058)
BTN_UP: IC1.1 R2.1 | length 86.2
  F.Cu w0.25: IC1.1@70.518,-23.577 77.183,-23.577 77.56,-23.2 v3(77.655,-23.2) ; v3(77.684,-14.444) 78.427,-13.7 126.28,-13.7 131.93,-19.35 141.43,-19.35 141.88,-18.9 141.88,-17.4 141.455,-16.975 R2.1@140.58,-16.975
  B.Cu w0.25: v3(77.655,-23.2) 77.722,-23.133 77.722,-22.558 77.88,-22.4 77.88,-18.567 77.684,-18.371 v3(77.684,-14.444)
CLK: IC1.32 J2.3 J3.4 | length 32.1
  F.Cu w0.3: IC1.32@79.943,-33.002 79.943,-34.063 80.337,-34.457 v1(88.88,-34.457) ; J3.4@87.808,-42.327 v1(89.173,-42.327)
  B.Cu w0.3: J2.3@88.128,-54.457 88.128,-47.552 89.173,-46.507 v1(89.173,-42.327) 89.173,-34.75 v1(88.88,-34.457)
DIO: IC1.33 J2.4 J3.2 | length 33.4
  F.Cu w0.254: IC1.33@81.868,-31.077 85.937,-31.077 86.36,-31.5 v1(89.78,-31.5) ; J3.2@87.808,-41.057 87.83,-41.078 89.758,-41.078 v1(89.78,-41.1)
  B.Cu w0.254: v1(89.78,-31.5) v1(89.78,-41.1) 89.78,-51.6 90.668,-52.488 J2.4@90.668,-54.457
EXTAL: C8.1 IC1.10 Y1.2 | length 7.1
  F.Cu w0.25: C8.1@65.863,-31.147 65.863,-29.227 Y1.2@65.888,-29.202 66.763,-29.202 67.888,-28.077 IC1.10@70.518,-28.077